# EAGLE board LED_Project (EAGLE 9.2.2)
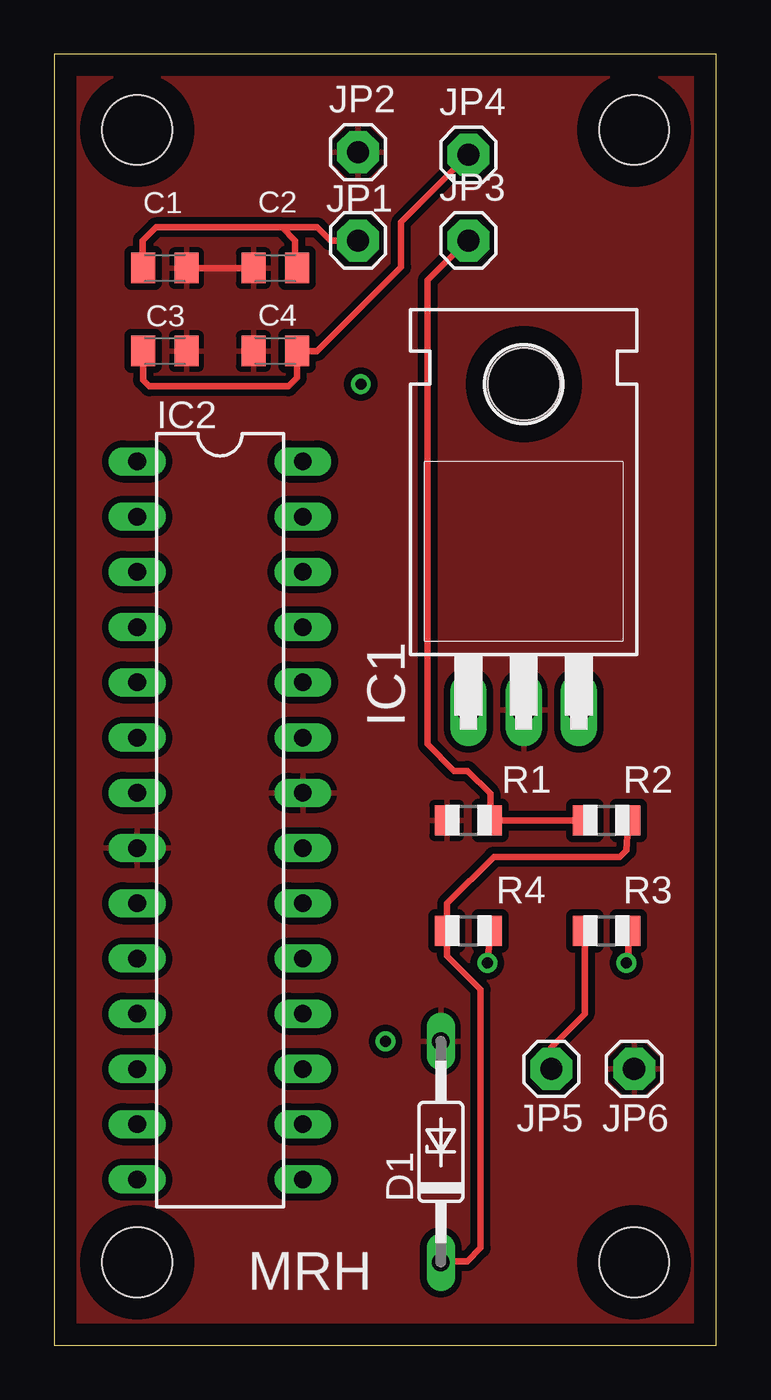
[diagram p0: board, top side]
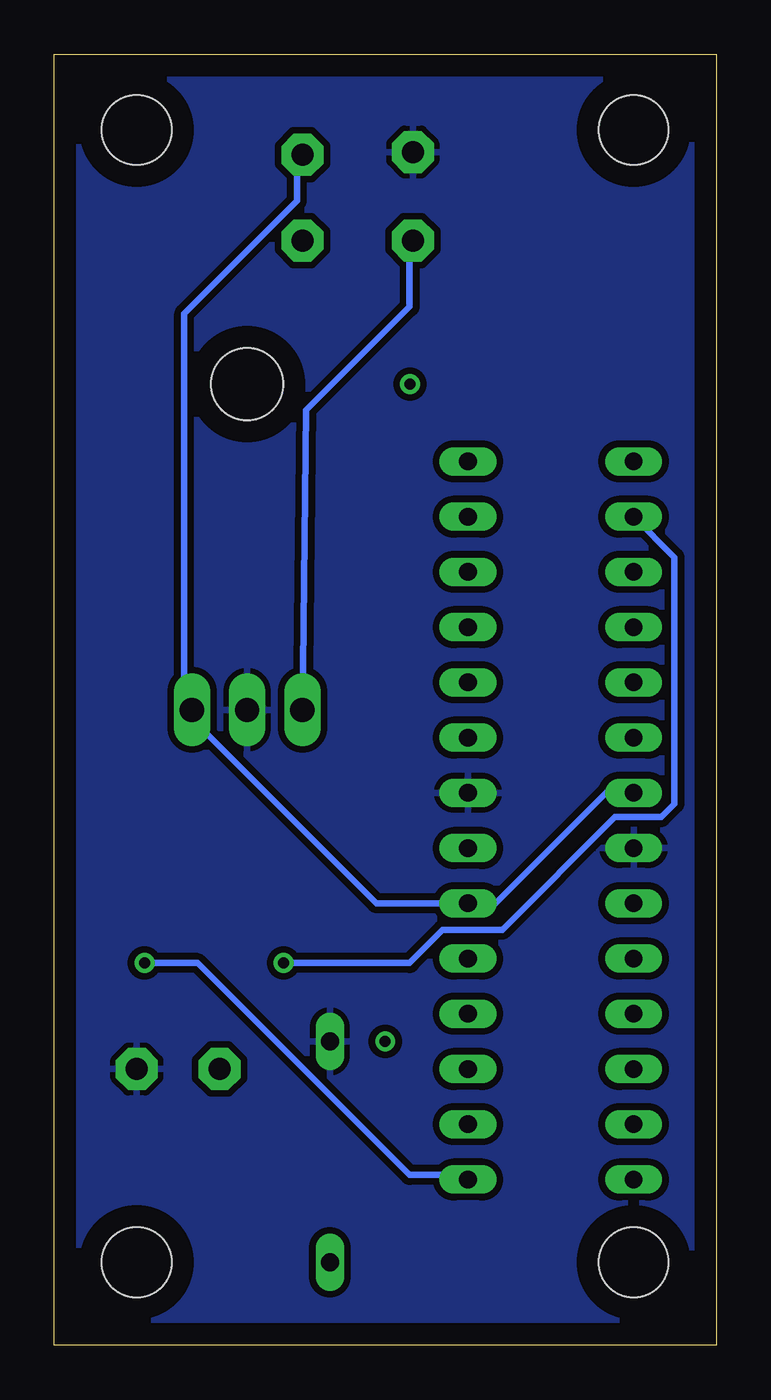
[diagram p1: board, bottom side, seen from below]

Size 30.46 x 59.36 mm. Coordinates in mm from the lower left corner, seen from the top.
Outline: 0,0 30.46,0 30.46,59.36 0,59.36 0,0
Copper layers (1*16): Top 0.035mm / dielectric 1.5mm / Bottom 0.035mm
Design rules "default": minimum track width 6mil, minimum drill 0.35mm, track to track 6mil, track to pad 6mil, pad to pad 6mil, via to via 6mil, smd to smd 6mil, copper to edge 40mil, drill to drill 6mil, minimum pad ring 10mil, minimum via ring 8mil, stop-mask expansion 4mil, vias tented up to drill 0mil, thermal gap 10mil
Net classes: 0 default: width 0.305 mm, drill 0.508 mm, clearance 0.305 mm
Holes 3.2 mm at 3.81,3.81 26.67,3.81 3.81,55.88 26.67,55.88

## Footprints (pad centres in the part's own frame; a part is rotated, then mirrored left to right if it is on the bottom)
C0805K = smd 1.1 x 1.4: 1 -1,0; 2 1,0
DO35Z10 = drill 0.813 long: A 5.08,0; C -5.08,0
TO220H = drill 1.118 long: 1 -2.54,-10.16; 2 0,-10.16; 3 2.54,-10.16 | hole 3.302: 0,4.826
DIL28-3 = drill 0.813 long: 1 -16.51,-3.81; 2 -13.97,-3.81; 3 -11.43,-3.81; 4 -8.89,-3.81; 5 -6.35,-3.81; 6 -3.81,-3.81; 7 -1.27,-3.81; 8 1.27,-3.81; 9 3.81,-3.81; 10 6.35,-3.81; 11 8.89,-3.81; 12 11.43,-3.81; 13 13.97,-3.81; 14 16.51,-3.81; 15 16.51,3.81; 16 13.97,3.81; 17 11.43,3.81; 18 8.89,3.81; 19 6.35,3.81; 20 3.81,3.81; 21 1.27,3.81; 22 -1.27,3.81; 23 -3.81,3.81; 24 -6.35,3.81; 25 -8.89,3.81; 26 -11.43,3.81; 27 -13.97,3.81; 28 -16.51,3.81
1X01 = drill 1.016 pad 1.93 octagon: 1 0,0
R0805 = smd 1.1 x 1.4: 1 -1,0; 2 1,0

## Placement (x,y rotation side)
C1  0.1u  [C0805K]  5.08,49.53 0 top
C2  10u  [C0805K]  10.16,49.53 180 top
C3  10u  [C0805K]  5.08,45.72 0 top
C4  0.1u  [C0805K]  10.16,45.72 180 top
D1  1N821  [DO35Z10]  17.78,8.89 90 top
IC1  7805T  [TO220H]  21.59,39.37 0 top
IC2  [DIL28-3]  7.62,24.13 270 top
JP1  [1X01]  13.97,50.8 0 top
JP2  [1X01]  13.97,54.86 0 top
JP3  [1X01]  19.05,50.8 0 top
JP4  [1X01]  19.05,54.74 0 top
JP5  [1X01]  22.86,12.7 0 top
JP6  [1X01]  26.67,12.7 0 top
R1  100k  [R0805]  19.05,24.13 0 top
R2  10  [R0805]  25.4,24.13 0 top
R3  200  [R0805]  25.4,19.05 0 top
R4  1k  [R0805]  19.05,19.05 0 top

## Library data of the parts
C1-C4 JP1-JP6 R1-R4 = adafruit
D1 = diode
IC1 = linear
IC2 = ic-package

## Nets
+5V: C3.1 C4.1 IC1.3 IC2.7 IC2.20 JP4.1
GND: C1.2 C2.2 C3.2 C4.2 D1.A IC1.2 IC2.8 IC2.22 JP2.1 JP6.1 R1.1
N$1: C1.1 C2.1 IC1.1 JP1.1
N$2: JP3.1 R1.2 R2.1
N$3: IC2.2 R4.2
N$5: D1.C R2.2 R4.1
N$6: IC2.15 R3.2
N$7: JP5.1 R3.1

## Tracks (layer width: path | path; a pad name or v marks a point on that pad's centre or on a via)
+5V
  Top 0.305: JP4.1 15.95,51.64 15.95,49.58 12.09,45.72 C4.1 11.16,44.48 10.77,44.09 4.37,44.09 4.08,44.38 C3.1
  Bottom 0.305: IC2.7 5.08,25.4 10.16,20.32 IC2.20 15.65,20.32 24.13,28.8 IC1.3 24.13,29.41 24.49,29.77 24.49,47.45 19.3,52.63 19.3,54.48 JP4.1
GND
  Top 0.305: C1.2 C2.2
  pour Top: -2.54,64.77 -2.54,-5.08 36.83,-5.08 36.83,64.77
  pour Bottom: 8.89,62.23 -3.81,62.23 -3.81,-1.27 34.29,-1.27 34.29,62.23
N$1
  Top 0.305: 10.46,51.41 4.67,51.41 4.06,50.8 4.06,49.55 arc90 C1.1 | 10.46,51.41 11.07,50.8 11.07,49.58 | 11.07,49.58 C2.1 arc90 C2.1 11.12,49.53 | 11.12,49.53 arc-90 11.07,49.58 | 11.07,49.58 arc90 11.12,49.53 | 11.12,49.53 arc-90 11.07,49.58 | 10.46,51.41 12.09,51.41 12.7,50.8 JP1.1
  Bottom 0.305: JP1.1 14.12,50.8 14.12,47.75 18.87,43 IC1.1
N$2
  Top 0.305: JP3.1 19,50.8 17.17,48.97 17.17,27.64 18.39,26.42 19,26.42 20.05,25.36 R1.2 R2.1
N$3  (via drill 0.51)
  Top 0.305: v19.91,17.58 R4.2
  Bottom 0.305: v19.91,17.58 14.12,17.58 12.6,19.1 9.86,19.1 4.67,24.28 2.54,24.28 1.93,24.89 1.93,36.22 IC2.2
N$5
  Top 0.305: D1.C 17.78,3.86 19,3.86 19.61,4.47 19.61,16.36 18.07,17.9 18.07,19.03 R4.1 18.07,19.07 18.07,20.3 20.22,22.45 26.01,22.45 26.31,22.76 R2.2
N$6  (via drill 0.51)
  Top 0.305: R3.2 26.4,17.66 v26.31,17.58
  Bottom 0.305: v26.31,17.58 23.88,17.58 14.12,7.82 11.63,7.82 IC2.15
N$7
  Top 0.305: JP5.1 22.86,13.7 24.27,15.11 24.4,15.24 R3.1
N$8  (via drill 0.51)
  other vias: 14.1,44.2
N$9  (via drill 0.51)
  other vias: 15.24,13.97

## Text on the board
tPlace: MRH